# EAGLE board MethaneFlux (EAGLE 9.6.2)
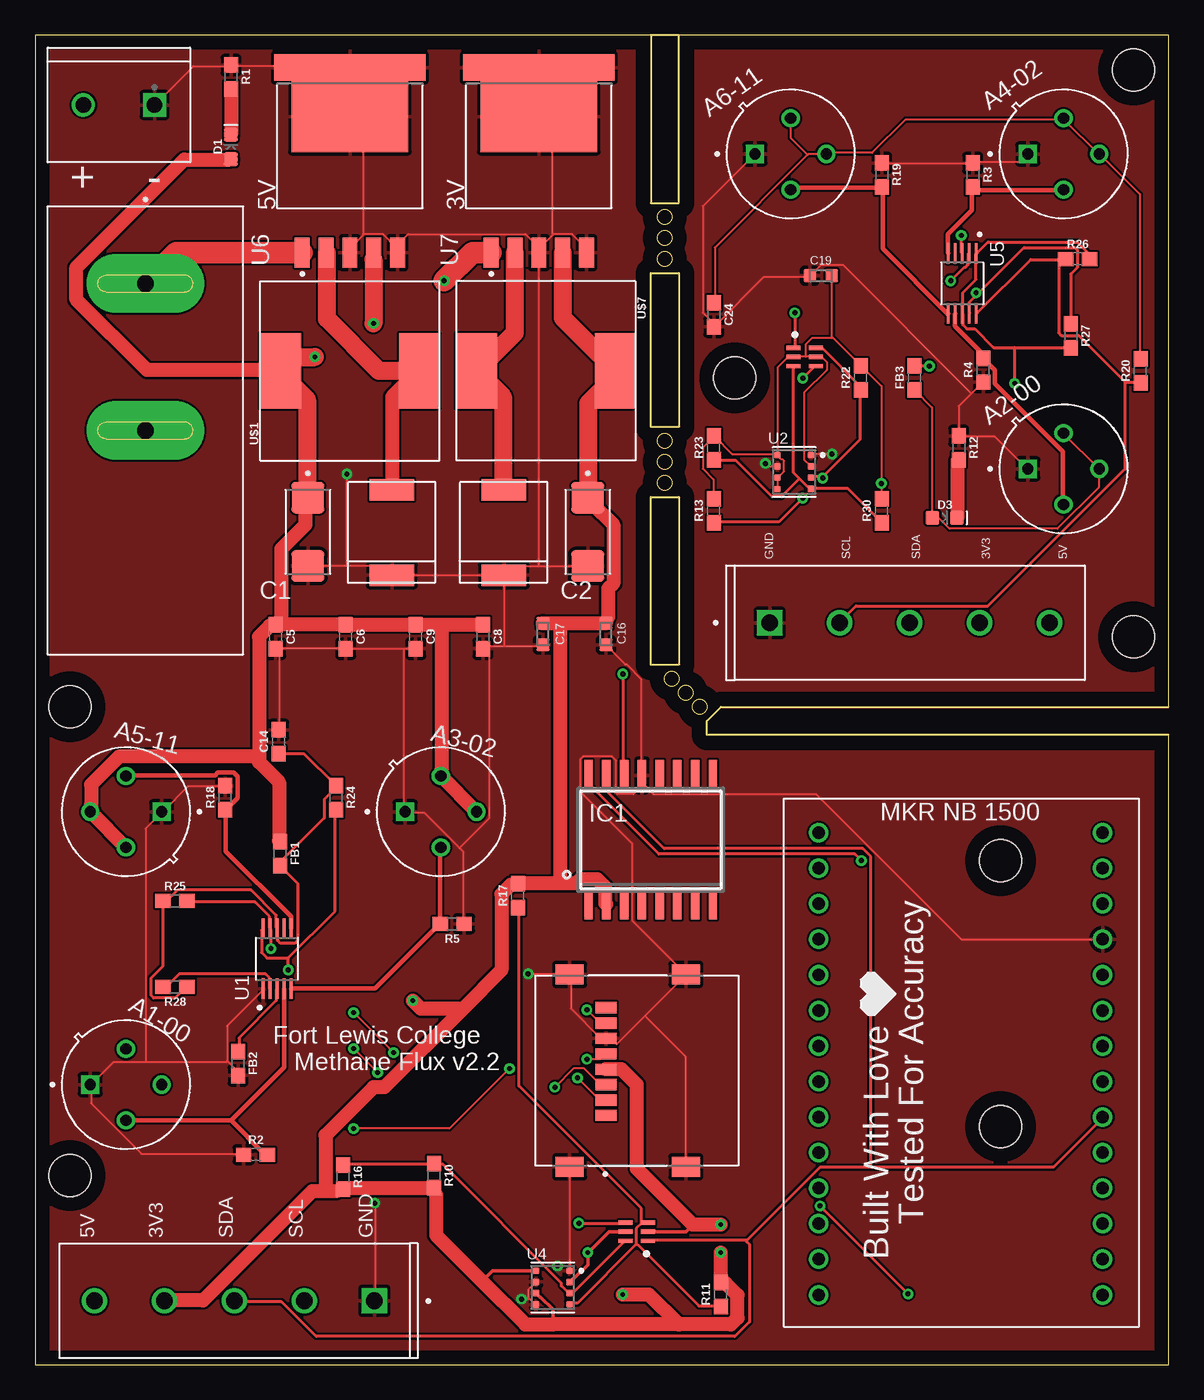
[diagram p0: board, top side]
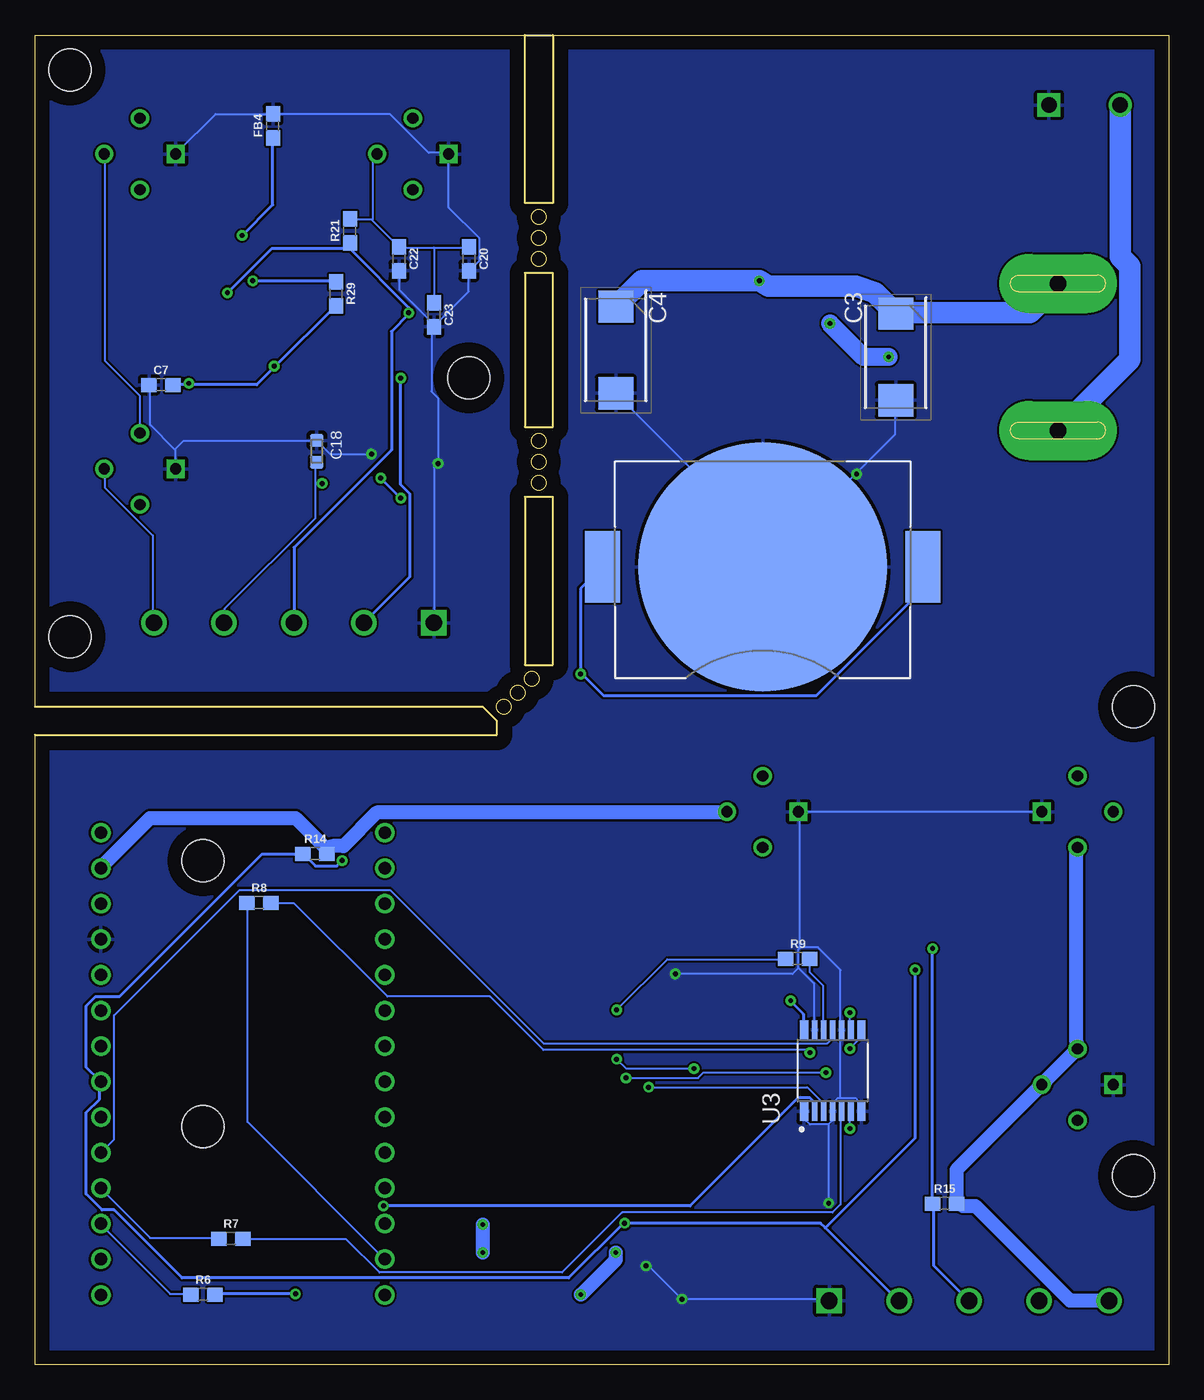
[diagram p1: board, bottom side, seen from below]

Size 81 x 95 mm. Coordinates in mm from the lower left corner, seen from the top.
Outline: 46,95 81,95 81,47 49,47 48,46 48,45 81,45 81,0 0,0 0,95 44,95
Outline: 46,95 46,83 44,83 44,95
Outline: 46,95 44,95
Outline: 44,78 46,78 46,67 44,67 44,78
Outline: 44,62 46,62 46,50 44,50 44,62
Outline: circle at 45,63 radius 0.5
Outline: circle at 45,64.5 radius 0.5
Outline: circle at 45,66 radius 0.5
Outline: circle at 45,79 radius 0.5
Outline: circle at 45,80.5 radius 0.5
Outline: circle at 45,82 radius 0.5
Outline: circle at 47.5,47 radius 0.5
Outline: circle at 46.5,48 radius 0.5
Outline: circle at 45.5,49 radius 0.5
Copper layers (1*16): Top 0.035mm / dielectric 1.5mm / Bottom 0.035mm
Design rules "default *": minimum track width 6mil, minimum drill 0.35mm, track to track 6mil, track to pad 6mil, pad to pad 6mil, via to via 6mil, smd to smd 6mil, copper to edge 40mil, drill to drill 6mil, minimum pad ring 10mil, minimum via ring 8mil, stop-mask expansion 4mil, vias tented up to drill 0mil, thermal gap 10mil
Net classes: 0 I2C: width 0.229 mm, clearance 0.003 mm; 1 ADC: width 0.305 mm, clearance 0.1 mm; 2 PowerIn: width 1.524 mm, clearance 0.003 mm; 3 5$3v3_3A: width 1.016 mm, clearance 0.003 mm; 5 GND: width 0.025 mm, clearance 0.003 mm; 6 P2_GND: width 0.025 mm, clearance 0.003 mm
Holes 3 mm at 78.5,52 50,70.5 78.5,92.5 2.5,13.5 2.5,47 69,36 69,17

## Footprints (pad centres in the part's own frame; a part is rotated, then mirrored left to right if it is on the bottom)
TO255P920H830-4 = drill 0.8 square: 1 -2.55,0 | drill 0.8: 2 0,-2.55; 3 2.55,0; 4 0,2.55
TGS2602 = drill 0.8 square: 1 -2.55,0 | drill 0.8: 2 0,-2.55; 3 2.55,0; 4 0,2.55
TGS2611 = drill 0.8 square: 1 -2.55,0 | drill 0.8: 2 0,-2.55; 3 2.55,0; 4 0,2.55
BAT_BAT-HLD-001 = smd 17.8 x 17.8: N1 0,0 | smd 2.5 x 5.1: P1 -11.45,0; P2 11.45,0
CAPPM6032X280N = smd 2.24 x 2.32: 1 -2.435,0; 2 2.435,0
CAPPM7344X310N = smd 2.3 x 2.5: 1 -3.1,0; 2 3.1,0
0603 = smd 1.1 x 1: 1 -0.85,0; 2 0.85,0
CAPC1608X92N = smd 0.92 x 0.97: 1 -0.775,0; 2 0.775,0
LED-0603 = smd 1 x 1: A -0.877,0; C 0.877,0
SO16W = smd 0.6 x 2.2: 1 -4.445,-4.6; 2 -3.175,-4.6; 3 -1.905,-4.6; 4 -0.635,-4.6; 5 0.635,-4.6; 6 1.905,-4.6; 7 3.175,-4.6; 8 4.445,-4.6; 9 4.445,4.6; 10 3.175,4.6; 11 1.905,4.6; 12 0.635,4.6; 13 -0.635,4.6; 14 -1.905,4.6; 15 -3.175,4.6; 16 -4.445,4.6
TE_282836-5 = drill 1.2 square: 1 -10,0 | drill 1.2: 2 -5,0; 3 0,0; 4 5,0; 5 10,0
AMPHENOL_GTFH08131YHR = smd 0.8 x 1.5: P1 3.2,-2.2; P2 2.1,-2.2; P3 1,-2.2; P4 -0.1,-2.2; P5 -1.2,-2.2; P6 -2.3,-2.2; P7 -3.4,-2.2; P8 -4.5,-2.2 | smd 1.45 x 2: SH1 -6.875,-4.8; SH2 6.875,-4.8; SH3 6.875,3.5; SH4 -6.875,3.5
TE_282837-2 = drill 1.1 square: 1 -2.54,0 | drill 1.1: 2 2.54,0
SW_RB141C1100 = drill 1.2 pad 4.2 long: 1 10.5,0; 2 0,0
SOP50P490X110-10N = smd 1.47 x 0.28: 1 -2.15,1; 2 -2.15,0.5; 3 -2.15,0; 4 -2.15,-0.5; 5 -2.15,-1; 6 2.15,-1; 7 2.15,-0.5; 8 2.15,0; 9 2.15,0.5; 10 2.15,1
PSON80P300X300X100-8N = smd 0.5 x 0.5: 1 1.2,1.2; 2 1.2,0.4; 3 1.2,-0.4; 4 1.2,-1.2; 5 -1.2,-1.22; 6 -1.2,-0.4; 7 -1.2,0.4; 8 -1.2,1.2
IC_74LVC125APW,118 = smd 1.35 x 0.6: 1 -2.925,2.05; 7 -2.925,-2.05; 8 2.925,-2.05; 14 2.925,2.05 | smd 1.35 x 0.4: 2 -2.925,1.3; 3 -2.925,0.65; 4 -2.925,0; 5 -2.925,-0.65; 6 -2.925,-1.3; 9 2.925,-1.3; 10 2.925,-0.65; 11 2.925,0; 12 2.925,0.65; 13 2.925,1.3
VREG_LM2596S-3.3 = smd 2.16 x 1.07: 1 -6.545,3.4; 2 -6.545,1.7; 3 -6.545,0; 4 -6.545,-1.7; 5 -6.545,-3.4 | smd 5.08 x 8.33: 6 3.175,0 | smd 1.91 x 10.8: 7 6.67,0
INDUCTOR_4X4MM = smd 5.4 x 2.9: P$1 0,-4.95; P$2 0,4.95
SOD-323 = smd 1.52 x 3.2: ANODE 0,0; CATHODE 6.1,0
SOT363 = smd 0.3 x 0.99: 1 -0.65,-0.8; 2 0,-0.8; 3 0.65,-0.8; 4 0.65,0.81; 5 0,0.81; 6 -0.65,0.81
MRKNB1500 = drill 0.889: +3V3 5.08,20.3; +5V 0,20.3; A0 2.54,0; A1 5.08,0; A2 7.62,0; A3 10.16,0; A4 12.7,0; A5 15.24,0; A6 17.78,0; AREF 0,0; CIPO 22.86,20.3; COPI 27.94,20.3; D0~ 20.32,0; D1~ 22.86,0; D2~ 25.4,0; D3~ 27.94,0; D4~ 30.48,0; D5~ 33.02,0; D6~ 33.02,20.3; D7~ 30.48,20.3; GND 7.62,20.3; RESET 10.16,20.3; RX 15.24,20.3; SCK 25.4,20.3; SCL 17.78,20.3; SDA 20.32,20.3; TX 12.7,20.3; VIN 2.54,20.3

## Placement (x,y rotation side)
A1-00  TGS2600  [TO255P920H830-4]  6.5,20 0 top
A2-00  TGS2600  [TO255P920H830-4]  73.5,64 0 top
A3-02  TGS2602  [TGS2602]  29,39.5 0 top
A4-02  TGS2602  [TGS2602]  73.5,86.5 0 top
A5-11  TGS2611  [TGS2611]  6.5,39.5 180 top
A6-11  TGS2611  [TGS2611]  54,86.5 0 top
BT1  BAT-HLD-001  [BAT_BAT-HLD-001]  29,57 0 bottom
C1  TAJC227K006RNJ  [CAPPM6032X280N]  19.5,59.5 270 top
C2  TAJC227K006RNJ  [CAPPM6032X280N]  39.5,59.5 270 top
C3  TAJD107K016RNJ  [CAPPM7344X310N]  19.5,72 270 bottom
C4  TAJD107K016RNJ  [CAPPM7344X310N]  39.5,72.5 270 bottom
C5  10uF  [0603]  17.2,52 90 top
C6  10uF  [0603]  22.2,52 270 top
C7  1.0uF  [0603]  72,70 0 bottom
C8  10uF  [0603]  32,52 270 top
C9  10uF  [0603]  27.2,52 270 top
C14  1.0uF  [0603]  17.42,44.5 90 top
C16  VJ0603Y104KLXAC5G  [CAPC1608X92N]  40.8,52.2 90 top
C17  VJ0603Y104KLXAC5G  [CAPC1608X92N]  36.3,52.2 90 top
C18  VJ0603Y104KLXAC5G  [CAPC1608X92N]  60.87,65.25 270 bottom
C19  VJ0603Y104KLXAC5G  [CAPC1608X92N]  56.15,77.8 0 top
C20  10uF  [0603]  50,79 270 bottom
C22  10uF  [0603]  55,79 270 bottom
C23  10uF  [0603]  52.5,75 270 bottom
C24  10uF  [0603]  48.5,75 270 top
D1  RED  [LED-0603]  14,87 90 top
D3  RED  [LED-0603]  65,60.5 0 top
FB1  30Ω/1.8A  [0603]  17.5,36.5 270 top
FB2  30Ω/1.8A  [0603]  14.5,21.5 270 top
FB3  30Ω/1.8A  [0603]  62.85,70.5 90 top
FB4  30Ω/1.8A  [0603]  64,88.5 90 bottom
FRAME1  FRAME-LEDGER  [CREATIVE_COMMONS]  21,-8 0 top  (outside the outline)
IC1  DS3231/SO  [SO16W]  44,37.5 0 top
J1  282836-5  [TE_282836-5]  14.25,4.55 180 top
J2  282836-5  [TE_282836-5]  62.5,53 0 top
J3  GTFH08131YHR  [AMPHENOL_GTFH08131YHR]  43,21 270 top
P1  282837-2  [TE_282837-2]  6,90 180 top
R1  470  [0603]  14,92 270 top
R2  470  [0603]  15.76,15 0 top
R3  470  [0603]  67,85 270 top
R4  470  [0603]  67.75,71.05 90 top
R5  470  [0603]  29.81,31.5 180 top
R6  3.3k  [0603]  69,5 0 bottom
R7  3.3k  [0603]  67,9 0 bottom
R8  3.3k  [0603]  65,33 0 bottom
R9  3.3k  [0603]  26.5,29 0 bottom
R10  4.7k  [0603]  28.5,13.5 270 top
R11  4.7k  [0603]  49,5 90 top
R12  470  [0603]  66,65.5 270 top
R13  4.7k  [0603]  48.5,61 90 top
R14  10k  [0603]  61,36.5 0 bottom
R15  10k  [0603]  16,11.5 0 bottom
R16  10k  [0603]  22,13.4 270 top
R17  10k  [0603]  34.5,33.5 90 top
R18  470  [0603]  13.59,40.5 270 top
R19  470  [0603]  60.5,85 270 top
R20  10k  [0603]  79,71 90 top
R21  10k  [0603]  58.5,81 90 bottom
R22  10k  [0603]  59,70.5 90 top
R23  10k  [0603]  48.5,65.5 90 top
R24  10k  [0603]  21.5,40.5 270 top
R25  10k  [0603]  10,33.12 0 top
R26  10k  [0603]  74.5,79 0 top
R27  10k  [0603]  74,73.5 270 top
R28  10k  [0603]  10,27 180 top
R29  10k  [0603]  59.5,76.5 270 bottom
R30  4.7k  [0603]  60.5,61 90 top
S1  RB141C1100  [SW_RB141C1100]  7.89,66.74 90 top
U1  ADS1115IDGSR  [SOP50P490X110-10N]  17.3,29 90 top
U2  BME680  [PSON80P300X300X100-8N]  54.25,63.78 0 top
U3  74LVC125APW,118  [IC_74LVC125APW,118]  24,21 90 bottom
U4  BME680  [PSON80P300X300X100-8N]  37,5.5 0 top
U5  ADS1115IDGSR  [SOP50P490X110-10N]  66.25,77.25 270 top
U6  LM2596S-3.3  [VREG_LM2596S-3.3]  22.5,86 90 top
U7  LM2596S-3.3  [VREG_LM2596S-3.3]  36,86 90 top
U$1  IN_33UH_3.8A_SMD  [INDUCTOR_4X4MM]  22.5,71 90 top
U$2  SS34_214AB  [SOD-323]  25.5,62.5 270 top
U$3  2N7002DW  [SOT363]  43,9.5 90 top
U$4  2N7002DW  [SOT363]  55,72 270 top
U$5  MKRNB1500  [MRKNB1500]  56,38 270 top
U$6  SS34_214AB  [SOD-323]  33.5,62.5 270 top
U$7  IN_33UH_3.8A_SMD  [INDUCTOR_4X4MM]  36.5,71 270 top

## Library data of the parts
A1-00 A2-00 = TGS2600; AVAILABILITY: In Stock; CHECK_PRICES: https://www.snapeda.com/parts/TGS2600/Figaro/view-part/?ref=eda; DESCRIPTION: Gas sensor [Figaro] TGS2600 Gas sensor; MF: Figaro; MP: TGS2600; PACKAGE: None; PRICE: None; SNAPEDA_LINK: https://www.snapeda.com/parts/TGS2600/Figaro/view-part/?ref=snap
A3-02 A4-02 A5-11 A6-11 = TGS2600
BT1 = BAT-HLD-001; AVAILABILITY: In Stock; CHECK_PRICES: https://www.snapeda.com/parts/BAT-HLD-001/Linx+Technologies+Inc./view-part/?ref=eda; DESCRIPTION: Holder for CR2032 and CR2025 Batteries, Surface-Mount, Bulk Packaging; MF: Linx Technologies; MP: BAT-HLD-001; PACKAGE: None; PRICE: None; PURCHASE-URL: https://www.snapeda.com/api/url_track_click_mouser/?unipart_id=184402&manufacturer=Linx Technologies&part_name=BAT-HLD-001&search_term=cr2032 battery holder; SNAPEDA_LINK: https://www.snapeda.com/parts/BAT-HLD-001/Linx+Technologies+Inc./view-part/?ref=snap
C1 C2 = TAJC227K006RNJ; CHECK_PRICES: https://www.snapeda.com/parts/TAJC227K006RNJ/Kyocera/view-part/?ref=eda; DESCRIPTION: Cap Tant Solid 220uF 6.3V C CASE 10% (6 X 3.2 X 2.6mm) Inward L SMD 6032-28 1.2 Ohm 125°C T/R; DIGIKEY_PART_NUMBER: 478-1713-2-ND; MF: KYOCERA AVX; MP: TAJC227K006RNJ; PACKAGE: None; PURCHASE-URL: https://www.snapeda.com/api/url_track_click_mouser/?unipart_id=11870375&manufacturer=KYOCERA AVX&part_name=TAJC227K006RNJ&search_term=tajc227k006rnj; SNAPEDA_LINK: https://www.snapeda.com/parts/TAJC227K006RNJ/Kyocera/view-part/?ref=snap
C3 C4 = TAJD107K016RNJ; CHECK_PRICES: https://www.snapeda.com/parts/TAJD107K016RNJ/AVX/view-part/?ref=eda; DESCRIPTION: Capacitor;Tantalum;Cap 100 uF;Tol 10%;Vol-Rtg 16 VDC;SMT;7343;ESR 0.9 Ohms;TR | AVX TAJD107K016RNJ; MF: AVX; MP: TAJD107K016RNJ; PACKAGE: 2917 AVX; RS_COMPONENTS_70001054_PURCHASE_URL: https://www.snapeda.com/api/url_track_click/https%253A//us.rs-online.com/product/avx/tajd107k016rnj/70001054/%253Futm_source%253DSnapEDA%2526utm_medium%253Dpart_sourcing%2526utm_campaign%253Dpartsourcing_SnapEDA_IMP_EX_GR/?unipart_id=320527&manufacturer=AVX&part_name=TAJD107K016RNJ&search_term=tajd107k016rnj; SNAPEDA_LINK: https://www.snapeda.com/parts/TAJD107K016RNJ/AVX/view-part/?ref=snap
C5 C6 C8 C9 C20 C22-C24 = SparkFun-Capacitors; PROD_ID: CAP-11015
C7 C14 = SparkFun-Capacitors; PROD_ID: CAP-00868
C16-C19 = VJ0603Y104KLXAC5G; AVAILABILITY: In Stock; CHECK_PRICES: https://www.snapeda.com/parts/VJ0603Y104KLXAC5G/Vishay/view-part/?ref=eda; DESCRIPTION: Multilayer Ceramic Capacitors MLCC - SMD/SMT 100nF 25volts 10%; MF: Vishay; MP: VJ0603Y104KLXAC5G; PACKAGE: 0603 Vishay; PRICE: None; SNAPEDA_LINK: https://www.snapeda.com/parts/VJ0603Y104KLXAC5G/Vishay/view-part/?ref=snap
D1 D3 = SparkFun-LED; PROD_ID: DIO-00819
FB1-FB4 = SparkFun-Coils; PROD_ID: NDUC-13805
FRAME1 = SparkFun-Aesthetics
IC1 = DS3231; AVAILABILITY: In Stock; CHECK_PRICES: https://www.snapeda.com/parts/DS3231/Analog+Devices/view-part/?ref=eda; DESCRIPTION: Real Time Clock (RTC) IC Clock/Calendar - I²C, 2-Wire Serial 8-SOIC (0.154, 3.90mm Width); MF: Analog Devices; MP: DS3231; PACKAGE: SOIC-16 Maxim Integrated; PRICE: None; PURCHASE-URL: https://www.snapeda.com/api/url_track_click_mouser/?unipart_id=553791&manufacturer=Analog Devices&part_name=DS3231&search_term=ds3231; SNAPEDA_LINK: https://www.snapeda.com/parts/DS3231/Analog+Devices/view-part/?ref=snap
J1 J2 = 282836-5; AVAILABILITY: In Stock; CHECK_PRICES: https://www.snapeda.com/parts/282836-5/TE+Connectivity+AMP+Connectors/view-part/?ref=eda; COMMENT: 282836-5; DESCRIPTION: 5 Position Wire to Board Terminal Block Horizontal with Board 0.197 (5.00mm) Through Hole; EU_ROHS_COMPLIANCE: Compliant with Exemptions; MF: TE Connectivity; MP: 282836-5; PACKAGE: None; PRICE: None; PURCHASE-URL: https://www.snapeda.com/api/url_track_click_mouser/?unipart_id=417471&manufacturer=TE Connectivity&part_name=282836-5&search_term=282836-5; SNAPEDA_LINK: https://www.snapeda.com/parts/282836-5/TE+Connectivity+AMP+Connectors/view-part/?ref=snap
J3 = GTFH08131YHR; AVAILABILITY: In Stock; CHECK_PRICES: https://www.snapeda.com/parts/GTFH08131YHR/Amphenol+FCI/view-part/?ref=eda; DESCRIPTION: Micro SD and SD Card Sockets, Input Output Connectors, Micro SD Socket, 8 Position, Hinge Type Right Angle SMT, LCP Black; MF: Amphenol ICC; MP: GTFH08131YHR; PACKAGE: None; PRICE: None; PURCHASE-URL: https://www.snapeda.com/api/url_track_click_mouser/?unipart_id=3603870&manufacturer=Amphenol ICC&part_name=GTFH08131YHR&search_term=micro sd socket; SNAPEDA_LINK: https://www.snapeda.com/parts/GTFH08131YHR/Amphenol+FCI/view-part/?ref=snap
P1 = 282837-2; AVAILABILITY: In Stock; CHECK_PRICES: https://www.snapeda.com/parts/282837-2/TE+Connectivity+AMP+Connectors/view-part/?ref=eda; COMMENT: 282837-2; DESCRIPTION: Terminal Block Connector Wire Receptacle 2 5.08 mm 30-16 AWG Green 13.5 A 250 V | TE Connectivity 282837-2; MF: TE Connectivity; MP: 282837-2; PACKAGE: None; PRICE: None; PURCHASE-URL: https://www.snapeda.com/api/url_track_click_mouser/?unipart_id=2549980&manufacturer=TE Connectivity&part_name=282837-2&search_term=None; SNAPEDA_LINK: https://www.snapeda.com/parts/282837-2/TE+Connectivity+AMP+Connectors/view-part/?ref=snap
R1-R5 R12 R18 R19 = SparkFun-Resistors; PROD_ID: RES-07869
R6-R9 = SparkFun-Resistors; PROD_ID: RES-07851
R10 R11 R13 R30 = SparkFun-Resistors; PROD_ID: RES-07857
R14-R17 R20-R29 = SparkFun-Resistors; PROD_ID: RES-00824
S1 = RB141C1100; AVAILABILITY: In Stock; CHECK_PRICES: https://www.snapeda.com/parts/RB141C1100/E-Switch/view-part/?ref=eda; DESCRIPTION: Rocker Switch, RB1 Series, SPST, ON-OFF, Non-Illum, Black, 15A, 125VAC, QC | E-Switch RB141C1100; MF: E-Switch; MP: RB141C1100; PACKAGE: None; PRICE: None; PURCHASE-URL: https://www.snapeda.com/api/url_track_click_mouser/?unipart_id=4449618&manufacturer=E-Switch&part_name=RB141C1100&search_term=rs-001g-a-bb-4; SNAPEDA_LINK: https://www.snapeda.com/parts/RB141C1100/E-Switch/view-part/?ref=snap
U1 U5 = ADS1115IDGSR; AVAILABILITY: In Stock; CHECK_PRICES: https://www.snapeda.com/parts/ADS1115IDGSR/Texas+Instruments/view-part/?ref=eda; DESCRIPTION: 16-bit, 860-SPS, 4-channel, delta-sigma ADC with PGA, oscillator, VREF, comparator and I2C; MF: Texas Instruments; MP: ADS1115IDGSR; PACKAGE: VSSOP-10 Texas Instruments; PRICE: None; PURCHASE-URL: https://www.snapeda.com/api/url_track_click_mouser/?unipart_id=45903&manufacturer=Texas Instruments&part_name=ADS1115IDGSR&search_term=ads1115idgsr; SNAPEDA_LINK: https://www.snapeda.com/parts/ADS1115IDGSR/Texas+Instruments/view-part/?ref=snap
U2 U4 = BME680; AVAILABILITY: In Stock; CHECK_PRICES: https://www.snapeda.com/parts/BME680/Bosch+Sensortec/view-part/?ref=eda; DESCRIPTION: Gas, Humidity, Pressure, Temperature Sensor I²C, SPI Output; MF: Bosch Sensortec; MP: BME680; PACKAGE: LGA-8 Bosch Tools; PRICE: None; PURCHASE-URL: https://www.snapeda.com/api/url_track_click_mouser/?unipart_id=947201&manufacturer=Bosch Sensortec&part_name=BME680&search_term=bme680; SNAPEDA_LINK: https://www.snapeda.com/parts/BME680/Bosch+Sensortec/view-part/?ref=snap
U3 = 74LVC125APW_118; AVAILABILITY: In Stock; CHECK_PRICES: https://www.snapeda.com/parts/74LVC125APW,118/Nexperia/view-part/?ref=eda; DESCRIPTION: Buffer, Non-Inverting 4 Element 1 Bit per Element 3-State Output 14-TSSOP; MF: Nexperia USA Inc.; MP: 74LVC125APW,118; PACKAGE: TSSOP14-14 Nexperia USA Inc.; PRICE: None; PURCHASE-URL: https://www.snapeda.com/api/url_track_click_mouser/?unipart_id=5248541&manufacturer=Nexperia USA Inc.&part_name=74LVC125APW,118&search_term=74lvc125apw; SNAPEDA_LINK: https://www.snapeda.com/parts/74LVC125APW,118/Nexperia/view-part/?ref=snap
U6 U7 = LM2596S-3.3; AVAILABILITY: In Stock; DESCRIPTION: SIMPLE SWITCHER&reg; 4.5V to 40V, 3A Low Component Count Step-Down Regulator 5-DDPAK/TO-263; MF: Texas Instruments; MP: LM2596S-3.3; PACKAGE: TO-263-5 Texas Instruments; PRICE: None; PURCHASE-URL: https://pricing.snapeda.com/search/part/LM2596S-3.3/?ref=eda
U$1 U$7 = SV_Inductors
U$2 U$6 = SV_Diode
U$3 U$4 = 2N7002DW; AVAILABILITY: In Stock; CHECK_PRICES: https://www.snapeda.com/parts/2N7002DW/Onsemi/view-part/?ref=eda; DESCRIPTION: Mosfet Array 60V 115mA 200mW Surface Mount SC-88 (SC-70-6); MF: onsemi; MP: 2N7002DW; PACKAGE: SC-88-6 ON Semiconductor; PRICE: None; PURCHASE-URL: https://www.snapeda.com/api/url_track_click_mouser/?unipart_id=7265289&manufacturer=onsemi&part_name=2N7002DW&search_term=2n7002dw; SNAPEDA_LINK: https://www.snapeda.com/parts/2N7002DW/Onsemi/view-part/?ref=snap
U$5 = MKRNB1500

## Nets
3.3V_1A: C2.1 C16.2 C17.2 IC1.2 J1.4 J3.P4 R10.2 R11.2 R16.2 R17.2 U3.14 U4.2 U4.6 U4.8 U7.4 U$3.2 U$3.5 U$7.P$2
3V_OUTPUT: U7.2 U$6.ANODE U$7.P$1
5V_1A [P2_PWR]: A2-00.3 A2-00.4 A4-02.3 A4-02.4 A6-11.3 A6-11.4 C20.1 C22.1 C23.1 C24.1 D3.A FB3.1 J2.5 R20.2 R21.2
5V_3A [5$3v3_3A]: A1-00.3 A1-00.4 A3-02.3 A3-02.4 A5-11.3 A5-11.4 C1.1 C5.2 C6.1 C8.1 C9.1 D1.A FB1.1 J1.5 R14.2 R15.2 U6.4 U$1.P$2 U$5.VIN
5V_OUTPUT: U6.2 U$1.P$1 U$2.ANODE
12V [PowerIn]: C3.1 C4.1 S1.1 U6.1 U7.1
ADC_GND: FB2.1 U1.3
ADC_PWR: C14.1 FB1.2 R24.1 R25.1 R28.1 U1.8
CS [SPI]: R8.1 U$5.D4~
CS_LLS [SPI]: J3.P2 U3.8
DI_LLS [SPI]: J3.P3 U3.3
DO_LLC [SPI]: J3.P7 R9.1
GND [GND]: A1-00.1 A3-02.1 A5-11.1 BT1.N1 C1.2 C2.2 C3.2 C4.2 C5.1 C6.2 C8.2 C9.2 C14.2 C16.1 C17.1 FB2.2 IC1.13 J1.1 J3.P6 J3.SH1 J3.SH2 J3.SH3 J3.SH4 P1.1 R1.1 R2.1 R5.1 R18.1 U1.1 U3.1 U3.4 U3.7 U3.10 U3.13 U4.1 U4.5 U4.7 U6.3 U6.5 U6.6 U6.7 U7.3 U7.5 U7.6 U7.7 U$2.CATHODE U$5.GND U$6.CATHODE
MISO [SPI]: U3.11 U$5.CIPO
MOSI [SPI]: R6.1 U$5.COPI
N$1 [5$3v3_3A]: D3.C R12.2
N$3: R6.2 U3.2
N$4 [PowerIn]: P1.2 S1.2
N$6 [SPI]: R7.2 U3.5
N$7 [SPI]: R8.2 U3.9
N$8 [SPI]: R9.2 U3.12
N$10: BT1.P1 BT1.P2 IC1.14
N$11 [5$3v3_3A]: D1.C R1.2
P1-A0 [ADC]: A1-00.2 R2.2 U1.4
P1-A1 [ADC]: A3-02.2 R5.2 U1.5
P1-A2 [ADC]: A5-11.2 R18.2 U1.6
P2-A0 [ADC]: A2-00.2 R4.2 U5.7
P2-A1 [ADC]: A4-02.2 R3.2 U5.5
P2-A2 [ADC]: A6-11.2 R19.2 U5.6
P2_3V3 [P2_PWR]: C18.2 C19.2 J2.4 R13.2 R22.2 R23.2 R30.2 U2.2 U2.5 U2.6 U2.8 U$4.2 U$4.5
P2_ADC_GND: FB4.1 U5.3
P2_ADC_PWR: C7.2 FB3.2 R26.2 R27.2 R29.2 U5.1 U5.8
P2_GND [P2_GND]: A2-00.1 A4-02.1 A6-11.1 C7.1 C18.1 C19.1 C20.2 C22.2 C23.2 C24.2 FB4.2 J2.1 R3.1 R4.1 R12.1 R19.1 U2.1 U2.7
P2_SCL: J2.2 R20.1 R26.1 U5.10 U$4.4
P2_SCL_3V: R23.1 R30.1 U2.4 U$4.3
P2_SDA: J2.3 R21.1 R27.1 U5.9 U$4.1
P2_SDA_3V: R13.1 R22.1 U2.3 U$4.6
RDY1: R28.2 U1.2
RDY2: R29.1 U5.2
SCK [SPI]: R7.1 U$5.SCK
SCK_LLS [SPI]: J3.P5 U3.6
SCL: IC1.16 J1.2 R14.1 R24.2 U1.10 U$3.4 U$5.SCL
SCL_3V: R11.1 R17.1 U4.4 U$3.3
SDA: IC1.15 J1.3 R15.1 R25.2 U1.9 U$3.1 U$5.SDA
SDA_3V: R10.1 R16.1 U4.3 U$3.6

## Tracks (layer width: path | path; a pad name or v marks a point on that pad's centre or on a via)
3.3V_1A  (via drill 0.35)
  Top 0.254: U$3.5 41,9.5 v39.5,8 39.5,7.14 38.53,6.17 38.47,6.17 U4.2 | U$3.2 46.5,9.5 47,10 | 31.95,5.96 32.7,6.7 U4.8 | U4.6 36.09,4.81 36.13,4.81 37,3.94 37,2.86
  Top 1.016: 28.48,12.57 22,12.57 R16.2 21.53,12.38 20.77,12.38 | 28.48,12.57 R10.2 | 46,2.86 49.72,2.86 50.2,3.33 50.2,4.95 49.34,5.81 49.05,5.81 R11.2 v49,8 | 46,2.86 37,2.86 35.05,2.86 31.95,5.96 28.67,9.24 28.67,12.1 28.48,12.57 | 20.77,12.38 19.81,12.38 12,4.57 9.34,4.57 J1.4 | 37.53,34.38 38.67,34.38 38.96,34.67 40.2,34.67 40.77,34.1 40.77,32.96 IC1.2 | 37.53,34.38 34.58,34.38 R17.2 34,34.29 33.34,33.62 33.34,28.19 30.57,25.43 | 40.77,52.96 37.53,52.96 | 37.53,52.96 36.39,52.96 C17.2 | 40.77,52.96 C16.2 | 37.72,79.44 U7.4 | 41.43,71.06 U$7.P$2 41.34,70.48 | 39.53,62.01 C2.1 39.81,61.53 41.34,60.01 41.34,55.82 40.96,55.44 40.96,53.44 40.77,52.96 | 37.53,52.96 37.53,34.38 | 20.77,12.38 20.77,16.38 24.19,19.81 24.96,19.81 30.57,25.43 | v49,10 47,10 43,14 43,20 41.9,21.1 J3.P4 | 30.57,25.43 27.57,25.43 v27,26 | 46,2.86 43.86,5 v42,5
  Top 1.27: 37.72,79.44 37.72,74.77 41.43,71.06 | 39.53,62.01 39.53,68.67 41.34,70.48
  Bottom 0.229: U3.14 26.1,24 26.1,25.05 26.96,25.91 v27,26
  Bottom 1.016: v49,8 v49,10 | v42,5 39.5,7.5 v39.5,8
3V_OUTPUT
  Top 0.229: 34.29,79.44 U7.2 | 31.62,71.06 U$7.P$1 31.62,70.96 | 33.43,62.58 U$6.ANODE
  Top 1.27: 34.29,79.44 34.29,73.72 31.62,71.06 | 33.43,62.58 33.43,69.15 31.62,70.96
5V_1A
  Top 0.152: FB3.1 62.87,69.63 64.1,68.39 64.1,60.58 D3.A 64.2,60.48 64.58,60.48 65.34,59.72 73.06,59.72 76.01,62.67 76.01,63.91 A2-00.3 76.01,64.01 73.53,66.48 A2-00.4 | 55.2,86.44 55.24,86.49 56.48,86.49 A6-11.3 56.58,86.58 59.82,86.58 62.2,88.96 73.44,88.96 A4-02.4 73.53,88.96 76.01,86.49 A4-02.3 76.11,86.49 78.96,83.63 78.96,71.91 R20.2 | 55.2,86.44 48.58,79.82 48.58,75.91 C24.1 | 55.2,86.44 54.01,87.63 54.01,88.96 A6-11.4
  Bottom 0.152: J2.5 72.58,53.05 72.58,59.24 76.01,62.67 76.01,63.91 A2-00.3 | 52.48,79.82 54.96,79.82 C22.1 55.05,79.92 56.91,81.77 | 52.48,79.82 50.01,79.82 C20.1 | 52.48,79.82 52.48,75.91 C23.1 | 56.91,81.77 56.96,81.82 58.48,81.82 R21.2 | 56.91,81.77 56.86,81.82 56.86,86.2 56.58,86.49 A6-11.3 | A2-00.4 73.53,66.58 73.53,69.25 76.01,71.72 76.01,86.49 A4-02.3
5V_3A  (via drill 0.35)
  Top 1.016: A5-11.4 6.48,36.96 4,39.43 A5-11.3 4,40.01 4,41.43 6,43.43 16,43.43 | D1.A 13.91,86.11 10.67,86.11 2.95,78.39 2.95,76.11 8,71.06 17.53,71.06 U$1.P$2 | 19.43,62.01 C1.1 19.34,61.44 19.34,60.01 17.62,58.29 17.62,53.34 C5.2 | 17.81,70.58 U$1.P$2 | A3-02.3 31.53,39.53 29.05,42.01 A3-02.4 29.05,42.48 29.05,52.86 | C5.2 17.24,52.86 22.19,52.86 C6.1 22.67,52.86 27.15,52.86 C9.1 27.72,52.86 29.05,52.86 | 16,43.43 16,52.01 16.76,52.77 C5.2 | 16,43.43 16,43.05 17.43,41.62 17.43,37.43 FB1.1 | 29.05,52.86 31.91,52.86 C8.1 | U$1.P$2 17.55,72 | U6.4 24.2,78.97 24.19,78.96
  Top 1.27: 19.43,62.01 19.43,68.96 17.81,70.58 | 17.55,72 v20,72 | 24.19,78.96 v24.19,74.39
  Bottom 1.016: J1.5 4.29,4.57 7.05,4.57 13.81,11.34 14.67,11.34 R15.2 15.14,11.53 15.14,13.91 9.14,19.91 A1-00.3 8.76,20.29 6.57,22.48 A1-00.4 6.57,23.05 6.57,36.86 A5-11.4 | 60.2,36.86 60.2,36.58 R14.2 | 60.2,36.86 62.39,39.05 72.77,39.05 76.3,35.53 U$5.VIN | 60.2,36.86 59.72,37.05 58.96,37.05 56.58,39.43 31.62,39.43 A3-02.3
  Bottom 1.27: v20,72 21.8,72 v24.19,74.39
5V_OUTPUT
  Top 0.229: 20.86,79.44 U6.2 | 25.53,62.58 U$2.ANODE | 27.34,70.96 U$1.P$1
  Top 1.016: 25.53,62.58 25.53,69.15 27.34,70.96
  Top 1.27: 20.86,79.44 20.86,74.72 24.58,71 U$1.P$1
12V  (via drill 0.35)
  Top 1.524: U7.1 31.26,79.45 v29.24,77.44 | U6.1 19.05,79.44 10.1,79.44 7.91,77.25 S1.1
  Bottom 1.524: C4.1 39.43,75.63 37.62,77.44 v29.24,77.44 28.58,77.06 22.33,77.06 20.98,76.58 C3.1 19.43,75.15 9.91,75.15 7.91,77.15 S1.1
ADC_GND
  Top 0.229: FB2.1 14.57,22.38 14.57,23.34 17.24,26 17.24,26.77 U1.3
ADC_PWR
  Top 0.229: R28.1 10.76,26.96 10,26.19 8.48,26.19 8.29,26.38 8.29,27.62 9.14,28.48 9.14,33.05 R25.1 9.24,33.15 9.43,33.15 10.19,33.91 15.43,33.91 17.24,32.1 17.24,31.24 U1.8 17.34,31.15 17.34,30.29 17.53,30.1 18.57,30.1 18.76,30.29 18.76,34.38 17.53,35.62 FB1.2 17.53,35.72 17.53,35.91 20.67,39.05 20.67,40.39 21.53,41.24 R24.1 21.43,41.43 19.24,43.62 17.43,43.62 C14.1
CS
  Bottom 0.152: R8.1 65.82,32.96 65.82,17.34 U$5.D4~
CS_LLS  (via drill 0.35)
  Top 0.152: v24.48,20.86 v22.77,22.57 | v38.77,20.48 40.29,18.95 40.77,18.95 J3.P2
  Bottom 0.152: v22.77,22.57 22,23.34 22,23.91 U3.8 | v24.48,20.86 33.24,20.86 33.62,20.48 v38.77,20.48
DI_LLS  (via drill 0.35)
  Top 0.152: v37.15,19.81 38.48,21.14 39.24,21.14 40.39,20 40.77,20 J3.P3
  Bottom 0.152: v37.15,19.81 25.81,19.81 24.67,18.67 24.67,18.1 U3.3
DO_LLC  (via drill 0.35)
  Top 0.152: v39.43,25.34 40.29,24.48 40.77,24.48 J3.P7
  Bottom 0.152: v39.43,25.34 35.81,28.96 27.43,28.96 R9.1
GND  (via drill 0.35)
  Top 0.152: 43.58,24.91 46.48,22 46.48,14.19 J3.SH3 | 43.58,24.91 41.58,22.91 41.24,23.24 40.86,23.24 J3.P6 40.77,23.34 40.39,23.34 38.29,25.43 38.29,27.81 J3.SH1 38.2,27.91 v35.24,27.91 | 43.58,24.91 46.48,27.81 J3.SH4 46.48,27.91 42.67,31.72 42.67,37.24 38.96,40.96 38.96,43.24 39.15,43.43 41.24,43.43 41.53,43.15 41.53,40.86 41.62,40.77 42.77,40.77 43.43,41.43 IC1.13 | C16.1 40.86,51.34 42.2,50.01 42.29,50.01 43.34,48.96 43.34,42.1 IC1.13 | U$5.GND 66.2,30.39 55.82,40.77 44.2,40.77 43.43,41.53 43.43,42.01 IC1.13 | 37.01,80.72 37.05,80.77 38.39,80.77 39.34,79.82 39.34,79.53 U7.5 | 37.01,80.72 36.01,79.72 36.01,79.53 U7.3 | 37.01,80.72 36.96,80.77 36.96,88.2 36.01,89.15 U7.6 36.01,89.25 36.01,92.58 U7.7 | 23.48,80.72 23.53,80.77 24.86,80.77 25.81,79.82 25.81,79.53 U6.5 25.81,79.92 26.67,80.77 35.05,80.77 36.01,79.82 U7.3 | 23.48,80.72 22.57,79.82 22.57,79.53 U6.3 | 23.48,80.72 23.43,80.77 23.43,88.3 22.57,89.15 U6.6 22.48,89.25 22.48,92.58 U6.7 22.48,92.68 22.38,92.77 14,92.77 R1.1 13.91,92.77 11.34,92.77 8.57,90.01 P1.1 | 22.29,57.05 24.86,57.05 25.43,56.48 U$2.CATHODE 25.53,56.39 33.43,56.39 U$6.CATHODE | 22.29,57.05 19.53,57.05 C1.2 | 32.48,51.34 32.1,51.34 32,51.24 C8.2 32.48,51.34 | 32.48,51.34 33.53,51.34 | 33.53,51.34 36.29,51.34 C17.1 | 36.01,57.05 34.1,57.05 33.53,56.48 U$6.CATHODE | 36.01,57.05 39.43,57.05 C2.2 | 33.53,51.34 33.53,56.39 U$6.CATHODE | 38.2,7.05 38.2,14.1 J3.SH2 | 38.2,7.05 38.2,6.76 U4.1 | 35.29,4.71 35.24,4.76 35.24,5.33 35.72,5.81 U4.7 | 35.29,4.71 35.72,4.29 U4.5 | v34.77,4.67 35.24,4.67 35.29,4.71 | v37.34,7.05 38.2,7.05 | 13.76,21.67 13.72,21.72 13.72,24.19 16.29,26.77 U1.1
  Top 0.152: 13.76,21.67 14.48,20.95 14.48,20.67 FB2.2 | R2.1 14.86,15.05 7.62,15.05 4,18.67 4,19.91 A1-00.1 4,20 5.62,21.62 7.91,21.62 | 7.91,21.62 13.72,21.62 13.76,21.67 | 17.43,51.15 C6.2 22.29,51.15 26.38,51.15 | 17.43,51.15 17.24,51.15 C5.1 17.43,51.15 | 17.43,51.15 17.43,45.43 C14.2 | 26.38,51.15 27.15,51.15 C9.2 | R18.1 13.53,41.34 10.95,41.34 9.14,39.53 A5-11.1 9.05,39.43 7.91,38.29 7.91,21.62 | 30.34,36.91 27.81,39.43 26.48,39.43 A3-02.1 26.38,39.53 26.38,51.15 | 30.34,36.91 30.57,36.67 30.57,31.53 R5.1 | v24.29,11.53 24.29,4.57 J1.1 | 32.48,51.34 32.48,39.05 30.34,36.91 | 22.29,57.05 v22.29,63.63 | 36.01,57.05 36.01,79.44 U7.3
  Bottom 0.152: 22.34,63.67 28.96,57.05 BT1.N1 28.1,58.01 39.43,69.34 C4.2 | 22.34,63.67 19.53,66.48 19.53,68.87 C3.2 | J1.1 24.29,4.57 24.38,4.67 v34.77,4.67 37.15,7.05 v37.34,7.05 | 23.43,19.05 23.62,19.05 23.91,18.76 23.91,18.1 U3.4 24,18 24,17.43 24.29,17.14 | 23.43,19.05 22.38,19.05 22,18.67 22,18.1 U3.7 | 24.29,17.14 25.62,17.14 26,17.53 26,18 U3.1 | 23.43,19.05 23.43,23.91 U3.10 23.43,24 23.43,28.19 25.05,29.81 26.29,29.81 26.34,29.77 | 26.43,28.34 26.48,28.38 26.48,29.62 26.34,29.77 | 26.43,28.34 25.34,27.24 25.34,24 U3.13 | A5-11.1 9.14,39.53 26.38,39.53 A3-02.1 26.38,39.43 26.38,29.81 26.34,29.77 | 24.29,17.14 v24.29,11.53 | v22.29,63.63 22.34,63.67 | v35.24,27.91 26.86,27.91 26.43,28.34
  pour Top: 0,95 44,95 44,49 48,45 81,45 81,0 0,0
  pour Bottom: 0,95 44,95 44,49 48,45 81,45 81,0 0,0
MISO
  Bottom 0.152: U$5.CIPO 75.34,16.1 75.34,24.96 66.39,33.91 55.63,33.91 44.67,22.95 24.38,22.95 24,23.34 24,23.91 U3.11
MOSI
  Bottom 0.152: R6.1 69.91,5.05 71.34,5.05 76.3,10 U$5.COPI
N$1
  Top 1.016: D3.C 65.91,60.58 65.91,64.58 R12.2
N$3  (via drill 0.35)
  Top 0.229: v56.1,11.34 v62.39,5.05
  Bottom 0.229: v62.39,5.05 68.1,5.05 R6.2 | v56.1,11.34 34.2,11.34 26.48,19.05 25.62,19.05 25.34,18.76 25.34,18.1 U3.2
N$4
  Bottom 1.524: P1.2 3.43,89.92 3.43,79.15 2.76,78.49 2.76,71.82 7.81,66.77 S1.2
N$6
  Bottom 0.152: R7.2 66.1,8.95 58.77,8.95 56.39,6.57 43.34,6.57 39.05,10.86 24,10.86 23.43,11.43 23.43,18 U3.5
N$7  (via drill 0.35)
  Top 0.152: v22.77,25.15 v25.62,22.29
  Bottom 0.152: v25.62,22.29 25.81,22.48 44.67,22.48 48.48,26.29 55.82,26.29 62.48,32.96 64.1,32.96 R8.2 | v22.77,25.15 22.77,24 U3.9
N$8
  Bottom 0.152: R9.2 25.62,28.96 25.62,28 24.67,27.05 24.67,24 U3.12
N$10  (via drill 0.35)
  Top 0.229: v42.01,49.34 42.01,42.1 IC1.14
  Bottom 0.229: BT1.P1 40.48,56.96 42.01,55.44 v42.01,49.34 41.91,49.34 40.39,47.82 25.15,47.82 17.62,55.34 17.62,56.96 BT1.P2
N$11
  Top 1.016: D1.C 14,87.92 14,91.06 R1.2
P1-A0
  Top 0.305: 14,17.43 16.38,15.05 16.57,15.05 R2.2 | 14,17.43 6.57,17.43 A1-00.2 | 14,17.43 17.81,21.24 17.81,26.77 U1.4
P1-A1
  Top 0.305: A3-02.2 28.96,36.86 28.96,31.53 R5.2 28.86,31.43 24.29,26.86 18.38,26.86 U1.5
P1-A2
  Top 0.305: U1.6 18.29,31.24 18.29,32 13.62,36.67 13.62,39.62 R18.2 13.72,39.72 14.48,40.48 14.48,42.01 14.19,42.29 13.05,42.29 12.86,42.1 6.57,42.1 A5-11.2
P2-A0
  Top 0.305: U5.7 65.72,75.06 65.72,74.2 67.72,72.2 67.72,71.91 R4.2 67.82,71.82 68.58,71.06 68.58,70.1 73.44,65.25 73.44,61.53 A2-00.2
P2-A1
  Top 0.305: U5.5 65.25,79.44 65.25,80.77 66.96,82.49 66.96,84.11 R3.2 67.06,83.92 73.44,83.92 A4-02.2
P2-A2
  Top 0.305: A6-11.2 54.01,84.01 54.1,84.11 60.48,84.11 R19.2 60.58,84.01 60.58,79.72 65.25,75.06 U5.6
P2_3V3  (via drill 0.35)
  Top 0.152: 53.05,63.34 53.05,62.58 U2.5 | 53.05,63.34 53.53,63.82 53.53,64.58 53.44,64.67 53.34,64.67 53.05,64.96 U2.8 | 53.05,63.34 U2.6 | R13.2 48.48,61.91 48.48,63.25 47.72,64.01 47.72,65.53 48.48,66.29 R23.2 48.58,66.29 49.82,65.06 52.96,65.06 U2.8 | U2.2 55.44,64.2 54.96,64.67 54.96,69.44 56.58,71.06 56.58,71.63 56.29,71.91 55.82,71.91 U$4.5 55.72,72.01 55.05,72.01 | 55.05,72.01 54.29,72.01 U$4.2 54.2,71.91 53.72,71.91 53.05,71.25 53.05,65.06 U2.8 | 57.01,73.39 58.96,71.44 R22.2 59.05,71.34 60.48,69.91 v60.48,62.96 60.48,61.91 R30.2 | 57.01,73.39 56.96,73.44 56.96,77.72 C19.2 | 55.05,72.01 55.05,72.87 55.53,73.34 56.96,73.34 57.01,73.39
  Bottom 0.152: 60.96,62.96 60.96,60.48 67.44,54.01 67.44,53.05 J2.4 | 60.96,62.96 60.96,64.39 C18.2 | v60.48,62.96 60.96,62.96
P2_ADC_GND  (via drill 0.35)
  Top 0.229: v66.2,80.68 66.2,79.44 U5.3
  Bottom 0.229: v66.2,80.68 64.01,82.87 64.01,87.63 FB4.1
P2_ADC_PWR  (via drill 0.35)
  Top 0.229: R26.2 75.34,79.06 75.34,79.34 74.49,80.2 68.1,80.2 67.34,79.44 U5.1 67.25,79.34 67.25,77.53 66.29,76.58 66.29,75.15 U5.8 66.29,75.06 66.29,74.3 66.58,74.01 67.15,74.01 68.48,72.68 70.01,72.68 | 70.01,72.68 73.91,72.68 R27.2 | v63.91,71.34 62.87,71.34 FB3.2 | v70.01,70.1 70.01,72.68
  Bottom 0.229: 70.01,70.01 65.15,70.01 63.87,71.3 | 70.01,70.01 71.06,70.01 C7.2 | 63.87,71.3 59.53,75.63 R29.2 | v63.91,71.34 63.87,71.3 | v70.01,70.1 70.01,70.01
P2_GND  (via drill 0.35)
  Top 0.152: 66.91,69.39 67.72,70.2 R4.1 | 66.91,69.39 66.01,68.48 66.01,66.39 R12.1 66.01,66.29 68.58,66.29 70.87,64.01 A2-00.1 | v56.96,65.06 55.53,65.06 U2.1 | R19.1 60.58,85.82 66.96,85.82 R3.1 67.06,85.92 70.29,85.92 70.87,86.49 A4-02.1 | v52.2,64.39 52.39,64.2 52.96,64.2 U2.7 | A6-11.1 51.44,86.49 47.72,82.77 47.72,75.15 48.58,74.3 C24.2 48.58,74.2 52.1,77.72 55.34,77.72 C19.1 55.44,77.82 56.2,78.58 57.72,78.58 66.91,69.39
  Bottom 0.152: v56.96,65.06 59.91,65.06 60.87,66.01 C18.1 60.96,66.01 70.39,66.01 71.01,65.39 | 71.01,65.39 70.96,65.34 A2-00.1 | 71.01,65.39 72.77,67.15 72.77,69.91 C7.1 | A4-02.1 70.87,86.58 68.1,89.34 FB4.2 63.91,89.34 55.63,89.34 52.86,86.58 51.53,86.58 A6-11.1 51.44,86.49 51.44,82.68 49.24,80.49 49.24,78.87 49.91,78.2 C20.2 50.01,78.11 50.01,76.68 52.48,74.2 C23.2 | C23.2 52.58,74.11 52.67,74.01 52.67,69.53 52.2,69.06 v52.2,64.39 52.48,64.1 52.48,53.05 J2.1 | C22.2 54.96,78.11 54.96,76.77 52.48,74.3 C23.2
  pour Bottom: 46,95 46,50 49,47 81,47 81,95
  pour Top: 46,95 46,50 49,47 81,47 81,95
P2_SCL  (via drill 0.35)
  Top 0.229: U5.10 67.34,75.15 71.15,78.96 73.63,78.96 R26.1 73.15,78.87 73.15,73.72 73.34,73.53 74.58,73.53 77.92,70.2 | 77.92,70.2 78.96,70.2 R20.1 | v54.86,70.48 55.72,71.34 U$4.4 | 77.92,70.2 77.92,64.01 68.1,54.2 58.67,54.2 57.53,53.05 J2.2
  Bottom 0.229: v54.86,70.48 54.86,62.87 54.2,62.2 54.2,56.29 57.44,53.05 J2.2
P2_SCL_3V
  Top 0.229: R30.1 60.48,60.2 58.1,62.58 55.53,62.58 U2.4 55.34,62.58 54.63,63.29 | 54.63,63.29 54.2,63.72 U$4.3 | 54.63,63.29 53.34,62.01 52.67,62.01 50.1,64.58 48.58,64.58 R23.1
P2_SDA  (via drill 0.35)
  Top 0.229: 67.39,76.53 66.77,75.91 66.77,75.15 U5.9 | 67.39,76.53 70.67,79.82 74.3,79.82 74.49,79.63 74.49,78.39 74.01,77.92 74.01,74.39 R27.1 | v54.29,75.15 54.29,72.68 U$4.1 | v67.25,76.58 67.34,76.58 67.39,76.53
  Bottom 0.229: J2.3 62.48,53.05 62.48,58.39 55.53,65.34 55.53,73.82 54.29,75.06 v54.29,75.15 54.29,75.53 58.48,79.72 58.48,80.11 R21.1 58.58,79.72 64.1,79.72 v67.25,76.58
P2_SDA_3V  (via drill 0.35)
  Top 0.229: 56.29,63.44 55.53,63.44 U2.3 | 56.29,63.44 58.96,66.1 58.96,69.63 R22.1 58.96,69.72 58.96,69.91 56.29,72.58 55.82,72.58 U$4.6 | v54.86,61.91 53.15,60.2 48.58,60.2 R13.1 | v56.29,63.34 56.29,63.44
  Bottom 0.229: v56.29,63.34 v54.86,61.91
RDY1
  Top 0.229: R28.2 9.24,27.05 9.43,27.05 10.29,27.91 16.48,27.91 16.76,27.62 16.76,26.86 U1.2
RDY2  (via drill 0.35)
  Top 0.229: v65.44,77.44 66.39,78.39 66.48,78.39 66.67,78.58 66.67,79.34 U5.2
  Bottom 0.229: v65.44,77.44 59.53,77.44 R29.1
SCK
  Bottom 0.152: R7.1 67.91,9.05 72.77,9.05 76.3,12.57 U$5.SCK
SCK_LLS  (via drill 0.35)
  Top 0.152: v22.77,16.86 29.62,16.86 v33.91,21.14 | v39.43,21.81 40.39,21.81 40.77,22.19 J3.P5
  Bottom 0.152: v22.77,16.86 22.77,18 U3.6 | v33.91,21.14 38.77,21.14 v39.43,21.81
SCL  (via drill 0.35)
  Top 0.229: v59.05,36.01 58.58,36.48 44.58,36.48 39.62,41.43 39.62,42.01 IC1.16 | 18.1,29.05 21.43,32.38 21.43,39.62 R24.2 | 18.1,29.05 16.57,29.05 16.19,29.43 16.19,31.05 16.29,31.15 U1.10 | v38.86,10.1 42.1,10.1 U$3.4 | v18.1,28.19 18.1,29.05
  Bottom 0.229: v59.05,36.01 59.44,35.62 60.96,35.62 61.82,36.48 R14.1 61.91,36.48 64.77,36.48 74.96,26.29 76.68,26.29 77.34,25.62 77.34,21.24 76.39,20.29 U$5.SCL 76.39,20.19 76.39,18.95 77.34,18 77.34,12.19 76.2,11.05 75.34,11.05 70.48,6.19 42.86,6.19 38.96,10.1 v38.86,10.1 24.86,10.1 24.53,9.76 | 24.53,9.76 19.34,4.57 J1.2 | v18.1,28.19 18.1,16.19 24.53,9.76
SCL_3V
  Top 0.229: 42.96,8.57 38.77,4.38 38.29,4.38 U4.4 | 42.96,8.57 42.96,9.72 43.34,10.1 43.72,10.1 U$3.3 43.34,10.19 43.34,11.14 34.58,19.91 34.58,32.58 R17.1 | R11.1 48.96,4.19 47.43,4.19 43.05,8.57 42.96,8.57
SDA  (via drill 0.35)
  Top 0.229: R25.2 10.86,33.05 15.72,33.05 16.76,32 16.76,31.24 U1.9 16.86,31.05 v16.86,29.72 | 50.86,8.86 43.81,8.86 U$3.1 | 50.86,8.86 56.1,14.1 59.72,14.1 | 59.72,14.1 72.77,14.1 76.3,17.62 U$5.SDA | 59.72,14.1 59.72,36.29 59.15,36.86 44.96,36.86 40.86,40.96 40.86,42.01 IC1.15 | J1.3 14.29,4.48 17.62,4.48 20.1,2 50.01,2 51.05,3.05 51.05,8.57 50.86,8.76 50.86,8.86
  Bottom 0.229: J1.3 14.29,4.57 16.76,7.05 16.76,11.43 R15.1 16.86,11.53 v16.86,29.72
SDA_3V
  Top 0.229: R16.1 22,14.29 28.48,14.29 R10.1 28.57,14.29 29.15,14.29 37.62,5.81 37.62,5.62 38.1,5.14 U4.3 38.29,5.14 38.48,5.14 42.1,8.76 U$3.6

## Text on the board
tNames: + | - | 5V | 3V | GND | SCL | SDA | 3V3 | 5V | Fort Lewis College / Methane Flux v2.2 | Tested For Accuracy | 5V | 3V3 | SDA | SCL | GND | Built With Love